# EAGLE board 135_Antenna (EAGLE 5.11)
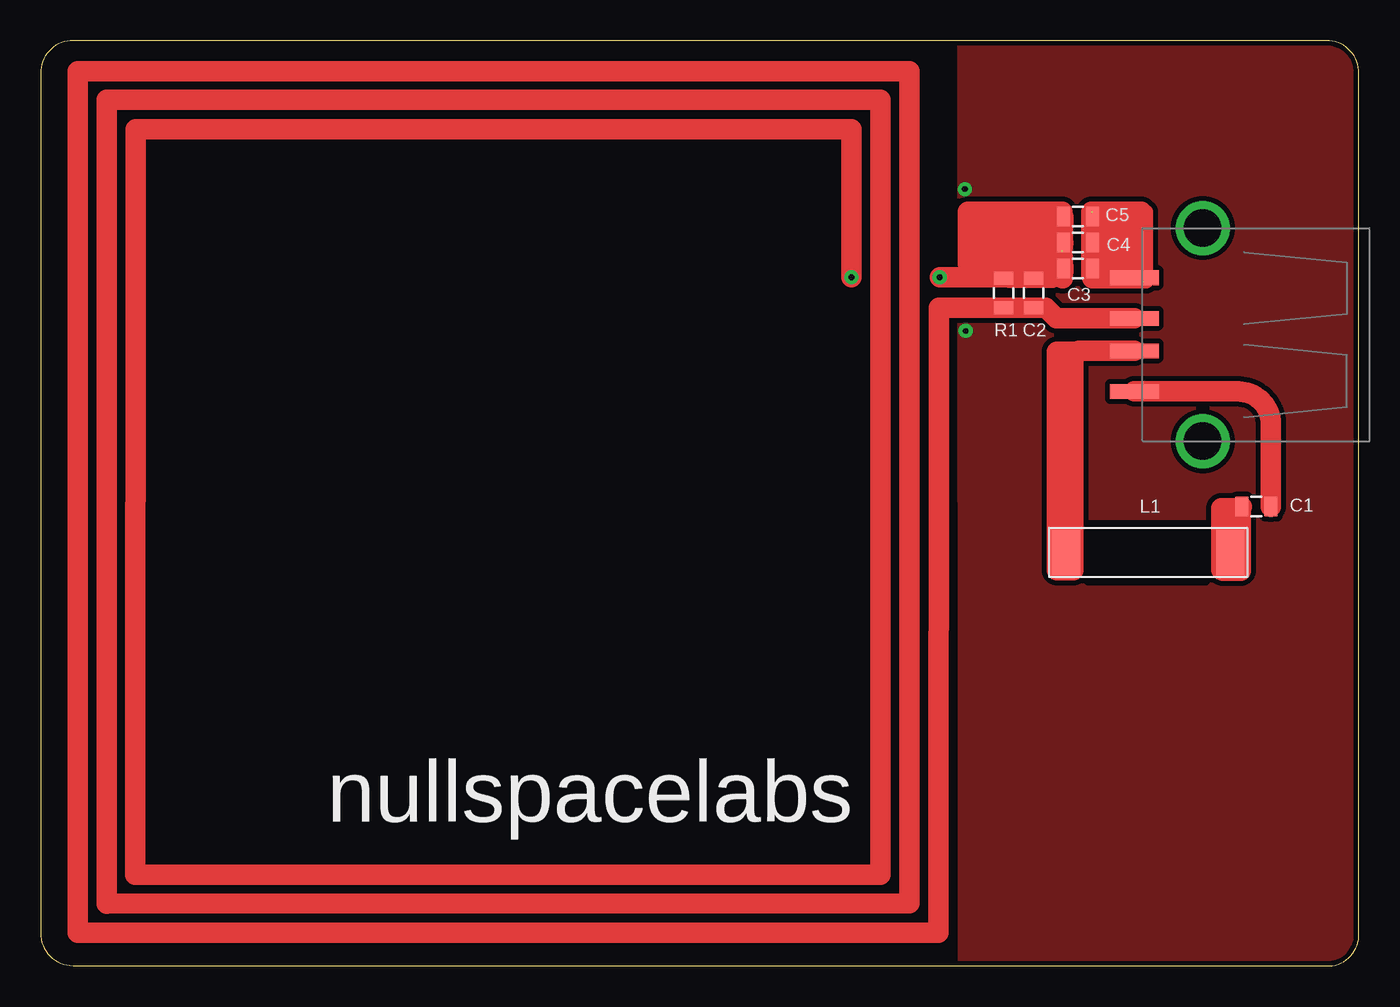
[diagram p0: board, top side]
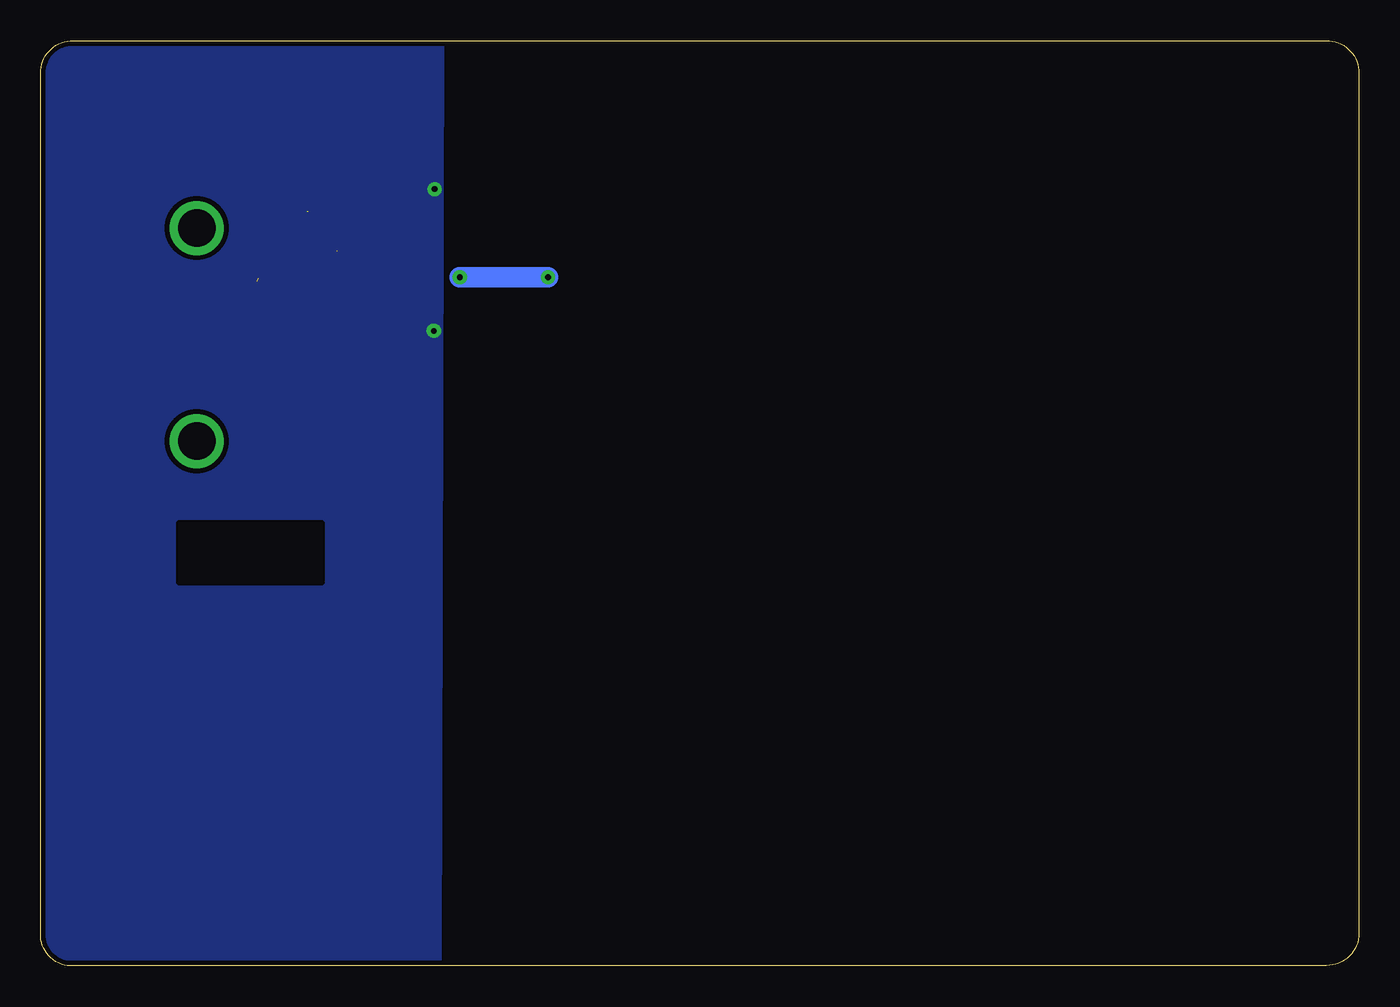
[diagram p1: board, bottom side, seen from below]

Size 81.23 x 57 mm. Coordinates in mm from the lower left corner, seen from the top.
Outline: 79.23,0 arc95 81.23,2 81.23,55 arc90 79.23,57 2,57 arc90 0,55 0,2.02 arc90 2,0.02 79.23,0
Copper layers (1*16): Top 0.0356mm / dielectric 1.5011mm / Bottom 0.0356mm
Design rules "SparkFun-mod": minimum track width 8mil, minimum drill 20mil, track to track 12mil, track to pad 12mil, pad to pad 8mil, via to via 8mil, smd to smd 8mil, copper to edge 12mil, drill to drill 8mil, minimum pad ring 12mil, minimum via ring 10mil, stop-mask expansion 4mil, vias tented up to drill 25mil, thermal gap 10mil
tRestrict: area 64.5,23.6 to 71.8,27.3
bRestrict: area 63.9,23.6 to 72.7,27.3

## Footprints (pad centres in the part's own frame; a part is rotated, then mirrored left to right if it is on the bottom)
0805 = smd 0.8 x 1.2: 1 -0.9,0; 2 0.9,0
4308RV = smd 1.803 x 2.794: P$1 5.08,0; P$2 -5.08,0
USB-A-S-NOSILK-FEMALE = smd 3 x 0.9: D+ 4.212,-1; D- 4.212,1; GND 4.212,-3.5; VBUS 4.212,3.5 | drill 2.311 round: P$5 0,-6.566; P$6 0,6.566

## Placement (x,y rotation side)
C1  4.7nf  [0805]  74.9,28.29 180 top
C2  [0805]  61.19,41.45 90 top
C3  150  [0805]  63.91,42.95 180 top
C4  100  [0805]  63.91,44.55 180 top
C5  20  [0805]  63.91,46.15 180 top
L1  4308RV-205X  [4308RV]  68.25,25.48 0 top
R1  [0805]  59.33,41.45 90 top
X1  USB-A-SMD  [USB-A-S-NOSILK-FEMALE]  71.6,38.89 180 top

## Library data of the parts
C1-C5 R1 = SparkFun
L1 = 135_Antenna
X1 = CR123aBoost

## Nets
HF: C3.1 C4.1 C5.1 X1.GND
HF_GND: C2.1 C2.2 C3.2 C4.2 C5.2 R1.1 R1.2 X1.D+
LF: C1.1 X1.VBUS
LF_GND: L1.P$2 X1.D-
N$2: C1.2 L1.P$1

## Tracks (layer width: path | path; a pad name or v marks a point on that pad's centre or on a via)
GND  (via drill 0.36)
  other vias: 56.95,47.85 57,39.12
  pour Top: 56.62,57.35 56.64,-0.2 81.66,0.15 81.58,57.28
  pour Bottom: 56.54,57.4 81.48,57.76 81.66,0.18 56.72,-0.18
HF  (2 unrouted)
  Top 0.406: X1.GND 67.34,42.39 67.34,42.37
  Top 0.813: 68.12,46.48 arc-90 68.15,46.46 68.15,42.14 67.94,42.14 arc-90 67.92,42.16 arc-90 67.46,42.62 67.46,42.9 67.46,45.75
  Top 1.27: C5.1 64.8,45.64 64.8,46.46 67.82,46.46 | 67.82,42.37 67.34,42.37 64.81,42.37 C3.1 | 64.74,42.57 64.74,43.59 | 64.74,43.59 64.74,44.04 | 64.74,44.04 64.74,46.46 66.93,46.46 66.93,44.6 65.73,44.6 65.73,44.5 65.63,44.5 65.63,45.57 | 65.63,45.57 66.01,45.57 | 65.63,45.57 64.78,45.57 | 64.74,44.04 C4.1 | 64.74,43.59 67.46,43.59 67.46,42.9
HF_GND  (via drill 0.36)  (1 unrouted)
  Top 0.813: C2.2 61.16,42.33 61.16,42.19 60.93,42.42 59.33,42.42 59.38,42.37 | 59.38,42.37 59.56,42.19 62.46,42.19 62.31,42.34 62.31,42.57 62.26,42.62 61.8,42.62 61.85,42.67 61.85,43.26 | R1.2 59.35,42.37 59.38,42.37
  Top 1.27: v49.96,42.42 49.96,51.54 5.87,51.54 5.84,5.61 51.74,5.61 51.74,53.34 4.06,53.34 4.06,3.83 53.54,3.86 53.54,55.12 2.29,55.12 2.29,2.06 55.32,2.06 55.35,39.26 55.35,40.55 R1.1 C2.1 61.94,40.55 62.59,39.9 arc90 62.6,39.89 X1.D+ | v55.4,42.42 59.33,42.42 | C3.2 62.96,42.35 | 62.98,42.37 C3.2 | 61.85,43.99 61.85,43.26 57.12,43.26 57.12,44.02 62.97,44.02 62.97,46.46 57.12,46.46 57.12,44.09 58.19,44.09 58.19,45.41 62,45.41 62,45.52 62.08,45.52 62.08,44.8 58.67,44.8 58.67,44.78 62.98,44.78 C5.2 | C4.2 62.96,44.04 C3.2
  Bottom 1.27: v49.96,42.42 v55.4,42.42
LF
  Top 1.27: X1.VBUS 73.8,35.39 arc-90 75.8,33.39 C1.1
LF_GND
  Top 0.406: 63.63,24.38 63.17,24.38 L1.P$2
  Top 1.27: X1.D- 64.09,37.89 arc-90 64.08,37.9 arc90 63.63,37.44 63.63,24.38 62.61,24.38 62.61,37.85 63.86,37.85 arc-90 63.91,37.8
N$2
  Top 0.406: 72.75,24.46 73.33,24.46 L1.P$1
  Top 1.27: C1.2 arc90 73.96,28.25 73.96,24.36 72.85,24.36 arc-90 72.75,24.46 72.75,28.19 73.43,28.19 arc-90 73.46,28.17

## Text on the board
tPlace: nullspacelabs